# Altium PCB iWoofer_V4_03_OT.PCB.PcbDoc
Units mil, origin at the board's own origin, x right, y up, seen from the top; angles counter-clockwise.
Board outline 944 x 1496.5 mil, 2 copper layers (TopLayer, BottomLayer), stack 39.4 mil thick; 60 components, 43 nets, 210 pads, 64 vias.
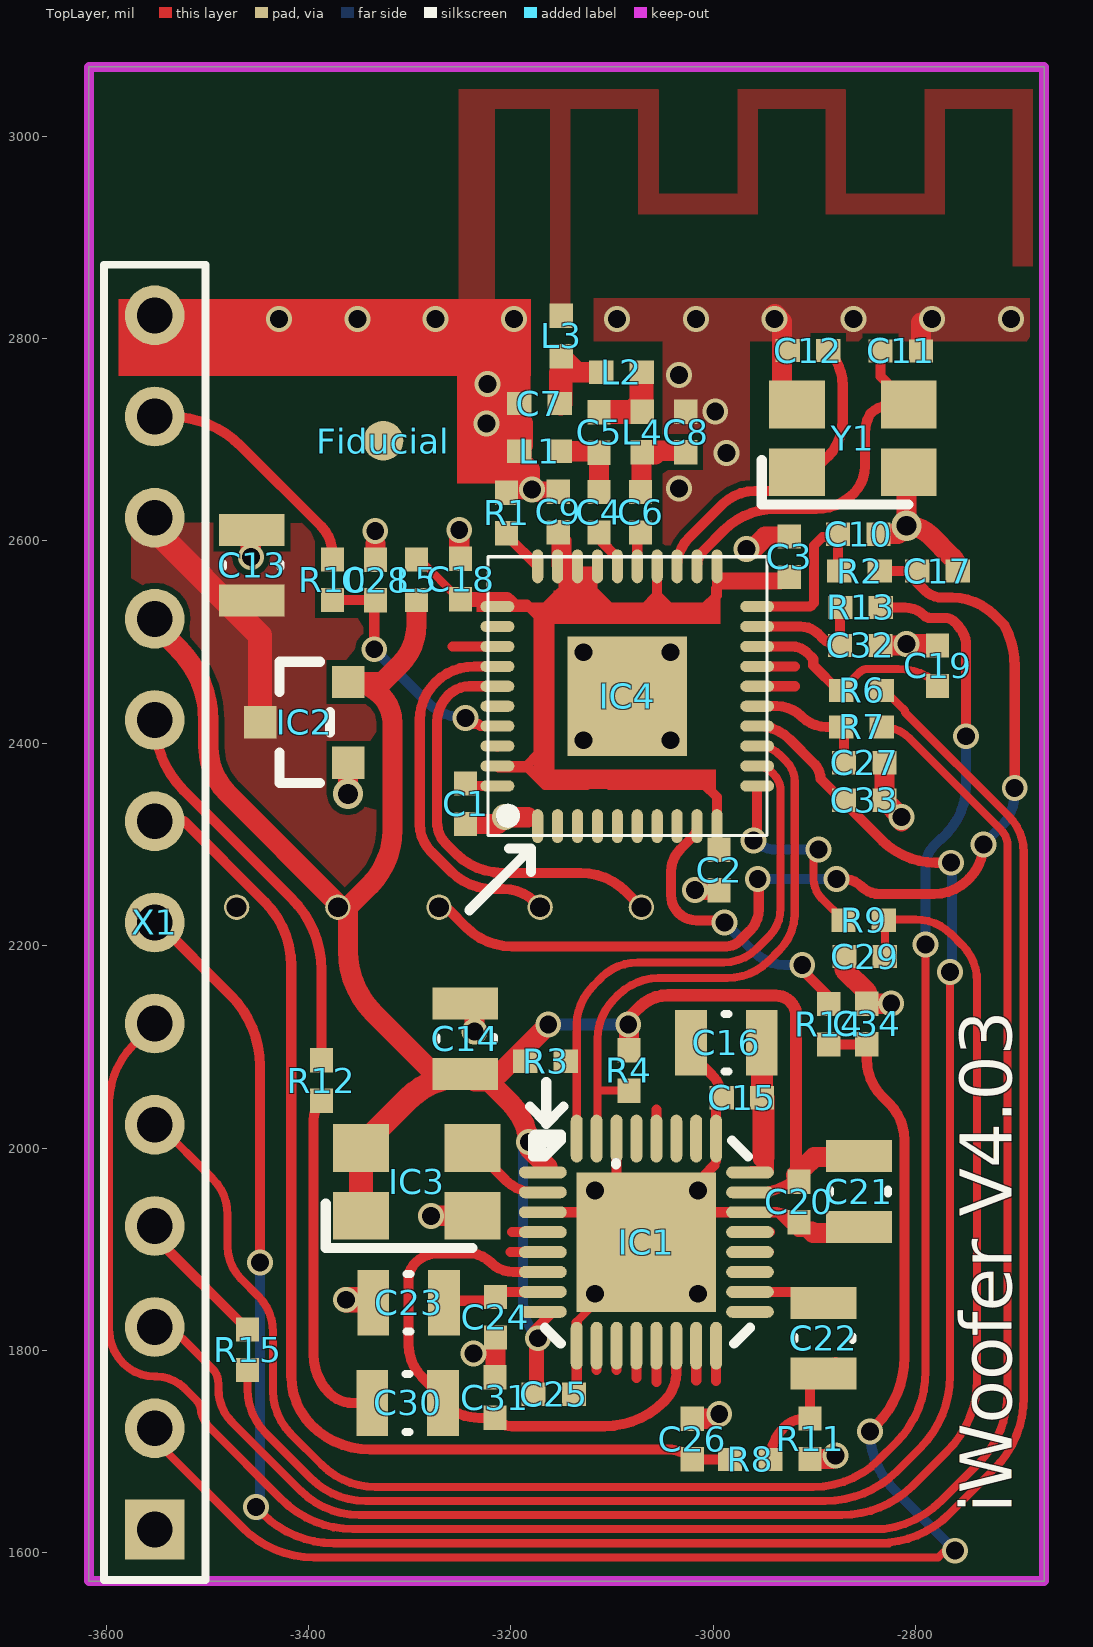
[diagram p0: TopLayer view]
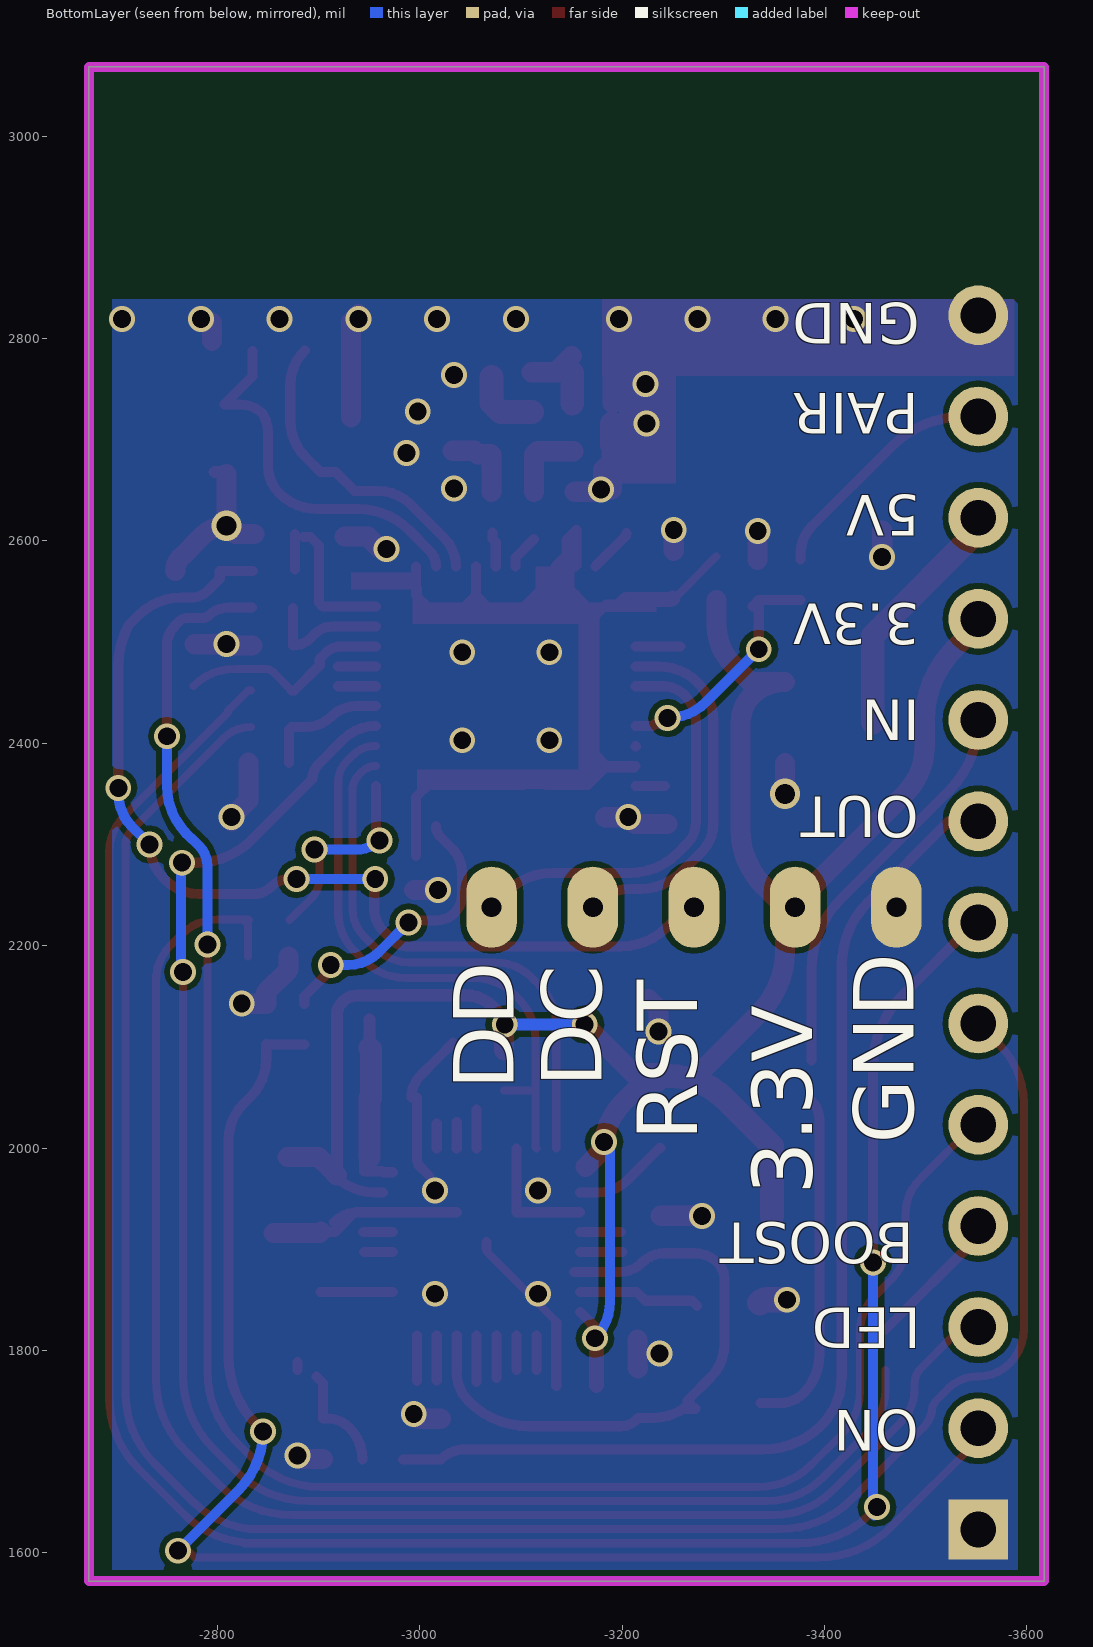
[diagram p1: BottomLayer view, seen from below]
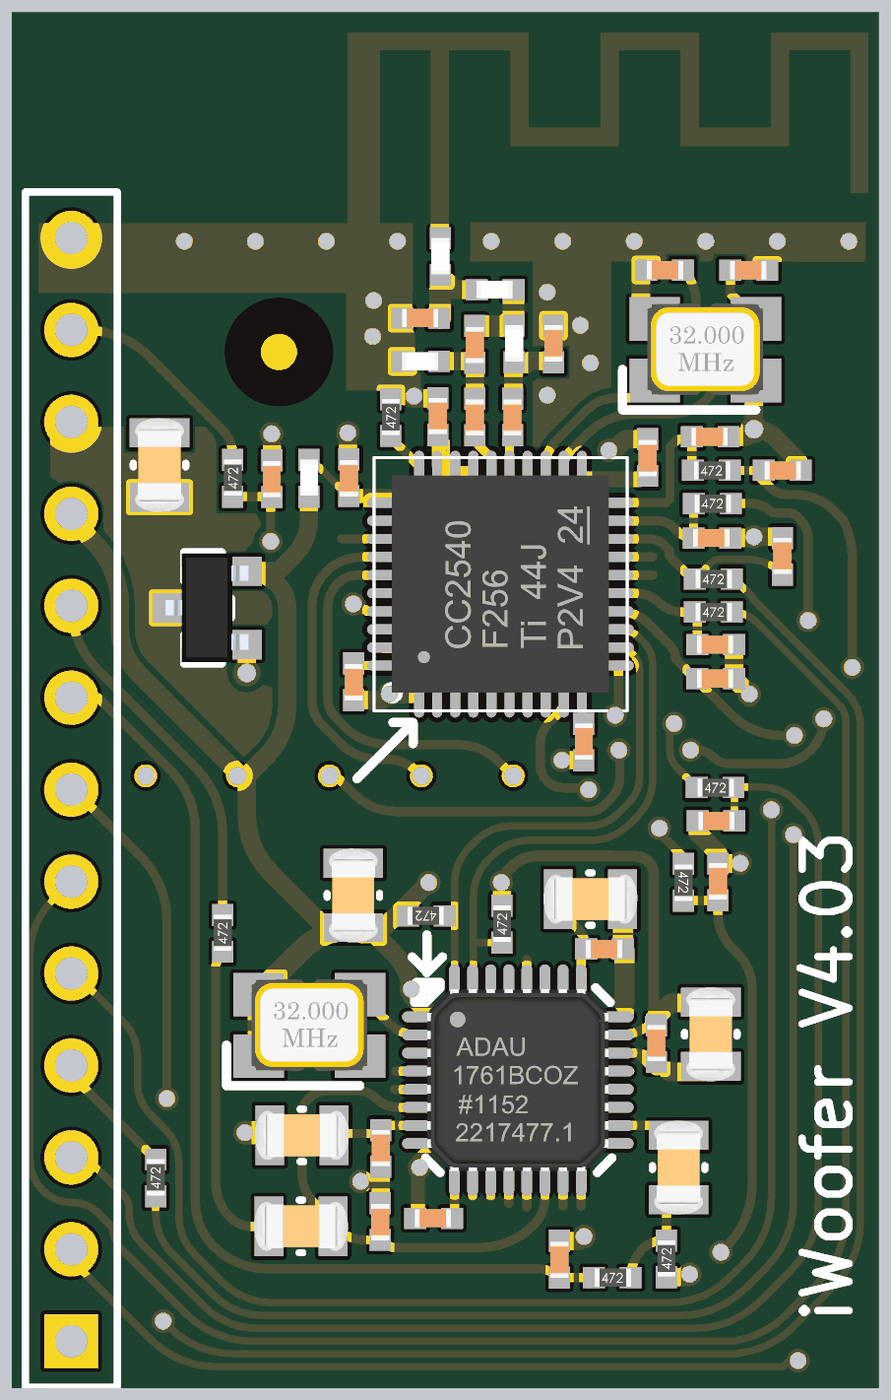
[diagram p2: 3D render of the assembled board from above, using the file's embedded part models]

## Layer stack, top to bottom
TopSolder: solder mask 0.4, Solder Resist, Dk 3.5
TopLayer: signal copper 1.4
Dielectric1: dielectric 36.6, FR-4, Dk 4.8
BottomLayer: signal copper 1.4
BottomSolder: solder mask 0.4, Solder Resist, Dk 3.5

## Board outline
-3617,1572 -3617,3068.5 -2673,3068.5 -2673,1572

## Design rules (kind name [scope] priority, off if disabled: settings)
Clearance HV [All] p1: gap=5.91 ignorepadtopadclearanceinfootprint=FALSE except(0: Arc-Hole Track-Hole SMDPad-Hole THPad-Hole Via-Hole Fill-Hole Poly-Hole Region-Hole Text-Hole)
Clearance clr.5 [All] p2: gap=7.8 ignorepadtopadclearanceinfootprint=FALSE except(0: Arc-Hole Track-Hole SMDPad-Hole THPad-Hole Via-Hole Fill-Hole Poly-Hole Region-Hole Text-Hole)
Clearance [All] p3: gap=7.8 ignorepadtopadclearanceinfootprint=FALSE except(0: Arc-Hole Track-Hole SMDPad-Hole THPad-Hole Via-Hole Fill-Hole Poly-Hole Region-Hole Text-Hole)
ComponentClearance [All] p1: gap=5 collisioncheckmode=3 verticalgap=5 showdistances=TRUE
FabricationTestPointUsage TestPointUsage [All] p1: valid=0 allowmultiple=FALSE
FabricationTestpoint Testpoint [All] p1: side=3 testpointundercomponent=TRUE minsize=40 maxsize=100 preferedsize=60 minholesize=0 maxholesize=40 preferedholesize=32 testpointgrid=1 allowsidetop=TRUE allowsidebottom=TRUE usegrid=TRUE gridtolerance=0.01
PolygonConnect "low voltage" [1 or 2 or 3] p1: connectstyle=Direct reliefconductorwidth=10 reliefentries=4 polygonreliefangle="90 Angle" airgapwidth=10
RoutingVias [All] p1: holewidth=19.68 width=30 viastyle="Through Hole" minholewidth=19.68 minwidth=30 maxholewidth=19.68 maxwidth=30
SilkToSilkClearance [All] p1: silktosilkclearance=0
SilkToSolderMaskClearance SilkscreenOverComponentPads [IsPad] p1: minsilkscreentomaskgap=5.91 clearancetoexposedcopper=TRUE
SolderMaskExpansion [All] p1: expansion=4
Width [All] p1: maxlimit=78.74 minlimit=8 preferedwidth=15.75
25 further rules are at their usual default settings.

## Components (designator, comment, footprint, x,y, rotation, side; value= is the part's Value field where it differs from the comment)
C1 "1u" 0402C -3245,2340 r180 top
C2 "100n" 0402C -2994,2275 r0 top
C3 "100n" 0402C -2925,2584 r180 top
C4 "18p" 0402C -3113,2628 r180 top
C5 "1p" 0402C -3113,2707 r180 top
C6 "18p" 0402C -3072,2628 r180 top
C7 "1p" 0402C -3172,2736 r90 top
C8 "1p" 0402C -3027,2708 r0 top
C9 "220p" 0402C -3153,2629 r0 top
C10 "1n" 0402C -2857,2607 r90 top
C11 "12p" 0402C -2815,2788 r90 top
C12 "12p" 0402C -2906,2788 r270 top
C13 "10u" CAPC0805X15L -3456,2576 r270 top
C14 "10u" CAPC0805X15L -3245,2108 r270 top
C15 "100n" 0402C -2972,2050 r90 top
C16 "10u" CAPC0805X15L -2987,2104 r180 top
C17 "100n" 0402C -2778,2570 r270 top
C18 "100n" 0402C -3250,2562 r180 top
C19 "1n" 0402C -2778,2477 r0 top
C20 "100n" 0402C -2915,1947 r0 top
C21 "10u" CAPC0805X15L -2856,1957 r90 top
C22 "10u" CAPC0805X15L -2891,1812 r270 top
C23 "10u" CAPC0805X15L -3301,1847 r0 top
C24 "100n" 0402C -3215,1833 r0 top
C25 "100n" 0402C -3158,1757 r90 top
C26 "1n" 0402C -3021,1712 r180 top
C27 "1n" 0402C -2851,2381 r90 top
C28 "1n" 0402C -3334,2561 r180 top
C29 "1n" 0402C -2850,2189 r270 top
C30 "10u" CAPC0805X15L -3302,1748 r0 top
C31 "1n" 0402C -3216,1753 r180 top
C32 "1n" 0402C -2855,2497 r90 top
C33 "1n" 0402C -2851,2344 r90 top
C34 "1n" 0402C -2848,2123 r0 top
Fiducial "Comment" FM2 -3326,2699 r0 top
IC1 "ADAU1761" ADAU1761_LONG -3066,1907 r0 top value={Value}
IC2 "SE8533X2" SOT-23_BC807-40(Primary) -3407,2422 r90 top
IC3 "12.288 MHz" OSC_3225 -3289,1996 r0 top
IC4 "CC2540F256" "CC2540 TOP" -3083,2447 r0 top
L1 "2n" 0402L -3172,2689 r90 top
L2 "1n" 0402L -3091,2767 r90 top
L3 "3n" 0402L -3150,2803 r0 top
L4 "2n" 0402L -3070,2708 r0 top
L5 "BEAD" 0402L -3293,2562 r0 top
R1 "56K" 0402R -3204,2628 r0 top
R2 "2.2K" 0402R -2855,2570 r270 top
R3 "4.7k" 0402R -3166,2086 r90 top
R4 "4.7k" 0402R -3083,2077 r0 top
R6 "1k" 0402R -2853,2452 r270 top
R7 "1k" 0402R -2853,2416 r270 top
R8 "270" 0402R -2963,1692 r270 top
R9 "270" 0402R -2851,2225 r270 top
R10 "1k" 0402R -3376,2562 r0 top
R11 "100k" 0402R -2904,1713 r0 top
R12 "1k" 0402R -3387,2067 r0 top
R13 "1k" 0402R -2854,2534 r270 top
R14 "270" 0402R -2886,2122 r180 top
R15 "1k" 0402R -3460,1801 r0 top
X1 "Header 13" HDR1X13 -3552,1623 r90 top
Y1 "32MHz" OSC_3225 -2858,2731 r0 top

## Footprints (in the part's own frame and the unit in brackets; to place one, negate y for a bottom-side part, rotate by r counter-clockwise, add the part's x,y. Pads: shape width x height; smd on the part's side, far side on the other; paste and mask are expansions set on the pad)
0402C [mil]
  rect 23x24 smd paste+0 mask+3.94: 1(-0.24,-20.32) 2(-0.24,19.68)
  body extent -10,-19 10,20, height 20
0402L [mil]
  rect 23x24 smd paste+0 mask+3.94: 1(-0.24,-20.32) 2(-0.24,19.68)
  body extent -10,-19 10,20, height 20
0402R [mil]
  rect 23x24 smd paste+0 mask+3.94: 1(-0.24,-20.32) 2(-0.24,19.68)
  body extent -10,-19 10,20, height 10
ADAU1761_LONG [mm]
  oval 1.2x0.3 smd: 1(-2.6,1.75) 2(-2.6,1.25) 3(-2.6,0.75) 4(-2.6,0.25) 5(-2.6,-0.25) 6(-2.6,-0.75) 7(-2.6,-1.25) 8(-2.6,-1.75) 17(2.6,-1.75) 18(2.6,-1.25) 19(2.6,-0.75) 20(2.6,-0.25) 21(2.6,0.25) 22(2.6,0.75) 23(2.6,1.25) 24(2.6,1.75)
  oval 0.3x1.2 smd: 9(-1.75,-2.6) 10(-1.25,-2.6) 11(-0.75,-2.6) 12(-0.25,-2.6) 13(0.25,-2.6) 14(0.75,-2.6) 15(1.25,-2.6) 16(1.75,-2.6) 25(1.75,2.6) 26(1.25,2.6) 27(0.75,2.6) 28(0.25,2.6) 29(-0.25,2.6) 30(-0.75,2.6) 31(-1.25,2.6) 32(-1.75,2.6)
  rect 3.5x3.5 smd: 22(0,0)
  silkscreen extent -2.85,-2.55 2.6,2.7, body extent -2.51,-2.51 2.51,2.51, height 0.85
CAPC0805X15L [mm] "Chip Capacitor, 2-Leads, Body 2.00x1.60mm, IPC High Density"
  rect 0.8x1.65 smd: 1(-0.889,0) 2(0.889,0)
  silkscreen extent -0.05,-0.72 0.05,0.72, body extent -1.3,-0.68 1.3,0.68, height 0.9
"CC2540 TOP" [mm]
  oval 0.28x0.85 smd paste+0 mask+0.14: 1(-2.298,-3.272) 2(-1.798,-3.272) 3(-1.298,-3.272) 4(-0.798,-3.272) 5(-0.298,-3.272) 6(0.202,-3.272) 7(0.702,-3.272) 8(1.202,-3.272) 9(1.702,-3.272) 10(2.202,-3.272) 21(2.202,3.248) 22(1.702,3.248) 23(1.202,3.248) 24(0.702,3.248) 25(0.202,3.248) 26(-0.298,3.248) 27(-0.798,3.248) 28(-1.298,3.248) 29(-1.798,3.248) 30(-2.298,3.248)
  oval 0.85x0.28 smd paste+0 mask+0.14: 11(3.212,-2.262) 12(3.212,-1.762) 13(3.212,-1.262) 14(3.212,-0.762) 15(3.212,-0.262) 16(3.212,0.238) 17(3.212,0.738) 18(3.212,1.238) 19(3.212,1.738) 20(3.212,2.238) 31(-3.308,2.238) 32(-3.308,1.738) 33(-3.308,1.238) 34(-3.308,0.738) 35(-3.308,0.238) 36(-3.308,-0.262) 37(-3.308,-0.762) 38(-3.308,-1.262) 39(-3.308,-1.762) 40(-3.308,-2.262)
  rect 3x3 smd paste+0 mask+0: 62(-0.043,-0.012)
  silkscreen extent -3.54,-3.51 3.46,3.49, body extent -3.05,-3.01 2.95,2.99, height 0.9
FM2 [mil]
  round 39.4 smd paste-39.4 mask+39.4: 1(0,0)
HDR1X13 [mm] "Connector; Header; 13 Position"
  rect 1.5x1.5 hole 0.9: 1(0,0)
  round 1.5 hole 0.9: 2(2.54,0) 3(5.08,0) 4(7.62,0) 5(10.16,0) 6(12.7,0) 7(15.24,0) 8(17.78,0) 9(20.32,0) 10(22.86,0) 11(25.4,0) 12(27.94,0) 13(30.48,0)
  silkscreen extent -1.27,-1.27 31.75,1.27
OSC_3225 [mm]
  rect 1.4x1.2 smd: 1(-1.5,-1.6) 2(1.3,-1.6) 3(1.3,0.1) 4(-1.5,0.1)
  silkscreen extent -2.39,-2.41 1.3,-1.3, body extent -1.7,-2 1.5,0.53, height 1
SOT-23_BC807-40(Primary) [mil]
  rect 32x32 smd: 1(38.66,-46.26) 2(-41.34,-46.26) 3(-1.34,40.74)
  silkscreen extent -61,-28 59,22, body extent -60,-48 58,43, height 43

## Part data
C1 C2 C3 C10 C15 C17 C18 C19 C20 C24 C25 C26 C27 C28 C29 C31 C32 C33 C34: library part Cap, "Capacitor", LatestRevisionDate=17-Jul-2002, LatestRevisionNote="Re-released for DXP Platform.", PackageReference=RAD-0.3, Published=8-Jun-2000, Publisher="Altium Limited"
C4 C5 C6 C7 C8 C9 C11 C12: library part Cap, "Capacitor NPO", LatestRevisionDate=17-Jul-2002, LatestRevisionNote="Re-released for DXP Platform.", PackageReference=RAD-0.3, Published=8-Jun-2000, Publisher="Altium Limited"
C13 C14 C16 C21 C22 C23 C30: library part Cap, "CL21A476MQMNRN or analog", LatestRevisionDate=17-Jul-2002, LatestRevisionNote="Re-released for DXP Platform.", PackageReference=RAD-0.3, Published=8-Jun-2000, Publisher="Altium Limited"
IC1: "DSP"
IC2: library part 78L05, "REGULATOR"
IC3: library part "YSO 321SR", "12.288 MHz Oscillator 5032 case"
IC4: library part CC2540, "cc2540f256"
L1 L4: library part Inductor, "HBLS1005-2N0S", Code_IEC=1005, Code_JEITA=0402, LatestRevisionDate=17-Jul-2002, LatestRevisionNote="Re-released for DXP Platform.", PackageReference=0402-A, Published=8-Jun-2000, Publisher="Altium Limited"
L2: library part Inductor, "HBLS1005-1N0S", Code_IEC=1005, Code_JEITA=0402, LatestRevisionDate=17-Jul-2002, LatestRevisionNote="Re-released for DXP Platform.", PackageReference=0402-A, Published=8-Jun-2000, Publisher="Altium Limited"
L3: library part Inductor, "HBLS1005-3N0S", Code_IEC=1005, Code_JEITA=0402, LatestRevisionDate=17-Jul-2002, LatestRevisionNote="Re-released for DXP Platform.", PackageReference=0402-A, Published=8-Jun-2000, Publisher="Altium Limited"
L5: library part Inductor, "bead 200@100MHz", Code_IEC=1005, Code_JEITA=0402, LatestRevisionDate=17-Jul-2002, LatestRevisionNote="Re-released for DXP Platform.", PackageReference=0402-A, Published=8-Jun-2000, Publisher="Altium Limited"
R1 R2 R3 R4 R6 R7 R8 R9 R10 R11 R12 R13 R14 R15: library part Res3, "Resistor", LatestRevisionDate=04-Mar-2005, LatestRevisionNote="PCB Footprint replaced.", PackageReference=J1-0603, Published=8-Jun-2000, Publisher="Altium Limited"
X1: "Header, 13-Pin", LatestRevisionDate=17-Jul-2002, LatestRevisionNote="Re-released for DXP Platform.", Publisher="Altium Limited"
Y1: library part XTAL, "Crystal 3225 case 10ppm", LatestRevisionDate=17-Jul-2002, LatestRevisionNote="Re-released for DXP Platform.", PackageReference=R38, Published=8-Jun-2000, Publisher="Altium Limited"

## Free pads (board coordinates)
  round 25 / inner round 60 / far side oval 50x80 hole 19.68: 0(-3471,2238) 0(-3371,2238) 0(-3271,2238) 0(-3171,2238) 0(-3071,2238)

## Via types
v1: diameter 25.59, hole 17.72, TopLayer to BottomLayer, tented both sides, 58 vias
v2: diameter 25.59, hole 17.72, TopLayer to BottomLayer, tented bottom, 4 vias
v3: diameter 30, hole 19.68, TopLayer to BottomLayer, tented both sides, 2 vias

## Nets (pads, with @x,y where several pads share a name; then routed paths per layer and width w, separated by ;. In a path a pad name is that pad's centre, name@x,y a point inside that pad or via, vN(x,y) a via of type N, cw(c..) or ccw(c..) an arc to the next point about the centre after c; other vN are vias at no path point)
3.3VD: C14.2 C20.2 C21.2 C25.2 IC1.1 IC1.8 IC1.23 IC2.1 IC3.1 IC3.4 L5.1 pad.0@-3371,2238 R3.2 R4.2 X1.10 | length 2203.8
  TopLayer w10: v1@-3177,1819.53 -3158.52,1838.01 IC1.8@-3158.52,1838.1 ; IC1.23 -2955.12,1956.21 ccw(c-2955.12,2010.15) C20.2@-2917.01,1971.98 ; C20.2@-2916.98,1972.01 C20.2@-2911.25,1977.74
  TopLayer w12: v1(-3084,2122) -3084,2128 -3072.5,2139.5 cw(c-3044.74,2111.74) -3044.74,2151 -2965.41,2151 -2965,2150.58 -2937.77,2150.58 cw(c-2937.77,2130.81) -2923.79,2144.79 ; -2923.77,2144.77 cw(c-2937.77,2130.81) -2918,2130.81 C20.2@-2918,1973.03 ; -2911.25,1979.78 -2902.24,1988.8
  TopLayer w15: C25.2@-3174.5,1765.21 v1@-3174.5,1810.5
  TopLayer w20: X1.10@-3558,2523 -3528.29,2493.29 cw(c-3599,2422.58) -3499,2422.58 -3499,2397 ccw(c-3432.71,2397) -3479.59,2350.13 pad.0@-3370,2240.54 ; -3340,2259 -3361,2238 -3361,2195 ccw(c-3273.6,2195) -3335.43,2133.23 C14.2@-3269.77,2067.57 ; -3339.98,2259.02 ccw(c-3395.53,2314.53) -3317,2314.53 -3317,2420.2 ccw(c-3355.14,2420.2) -3328.17,2447.17 ; -3328.2,2447.2 ccw(c-3360.74,2414.6) IC2.1 -3326.75,2460.66 -3309.71,2477.71 ccw(c-3349.47,2517.47) -3293.24,2517.47 L5.1 ; C14.2@-3239.6,2074 -3211,2074 v1(-3163,2122) ; C14.2@-3236,2066 -3222,2066 -3200.76,2044.76 ; -3200.75,2044.75 cw(c-3246.04,1999.47) -3182,1999.47 IC1.1@-3164,1981.47 ; v1(-3084,2122) -3083.24,2121.24 R4.2 ; C20.2@-2918,1973.03 -2911.25,1979.78 -2900.03,1991 C21.2@-2869.4,1991
  TopLayer w23.62: IC3.1 IC3.4 -3348.06,2001.94 -3301.63,2048.37 cw(c-3247,1993.75) -3274.34,2066 cw(c-3247,1993.75) -3269.77,2067.57 cw(c-3247,1993.75) C14.2@-3247,2071
  BottomLayer w10: v1@-3188,2000 -3188,1848.21 ccw(c-3136.79,1848.21) v1(-3173,1812)
  BottomLayer w12: v1(-3163,2122) v1(-3084,2122)
  other v1: -3182,2006
+5VDC: C13.2 IC2.3 X1.11 | length 248
  TopLayer w23.62: X1.11@-3558,2623 -3558,2617 -3447.74,2506.74 IC2.3
BOOST: R15.2 X1.4 | length 140.3
  TopLayer w10: X1.4 -3552,1912.45 R15.2
DC: IC4.34 pad.0@-3171,2238 | length 359
  TopLayer w10: -3274.72,2459.98 ccw(c-3237.7,2423.02) -3290.01,2423.02 -3290.01,2320 ccw(c-3251.74,2320) -3278.81,2292.95 -3258.93,2273.07 ccw(c-3217.96,2314.04) -3217.96,2256.09 -3207.61,2256.09 cw(c-3207.61,2211.39) pad.0@-3176.02,2243.02 ; -3274.69,2460.01 -3274.64,2460.06 cw(c-3236,2421.42) -3236,2476.06 IC4.34
DD: IC4.35 pad.0@-3071,2238 | length 416.6
  TopLayer w10: -3261.73,2447.69 ccw(c-3234.76,2420.76) -3272.87,2420.76 -3272.87,2322.05 ccw(c-3242.58,2322.05) -3272.14,2315.41 ccw(c-3242.58,2322.05) -3264.02,2300.65 -3254.73,2291.35 ccw(c-3208,2338.08) -3208,2272 -3131.16,2272 cw(c-3131.16,2208.84) -3086.5,2253.5 pad.0@-3071,2238 ; -3261.69,2447.73 cw(c-3240.78,2426.78) -3240.78,2456.38 IC4.35
GND: C1.2 C2.1 C3.1 C7.2 C8.2 C9.2 C10.1 C11.1 C12.1 C13.1 C14.1 C15.2 C16.2 C17.2 C18.1 C19.2 C20.1 C21.1 C23.1 C24.1 C25.1 C26.1 C27.1 C28.1 C29.1 C31.1 C32.1 C33.1 C34.2 IC1.3 IC1.9 IC1.22 IC1.25 IC1.30 IC2.2 IC3.2 IC4.1 IC4.62 L1.2 L3.2 pad.0@-3471,2238 R1.2 R11.1 X1.1 X1.13 Y1.2 Y1.4 | length 1775.6
  TopLayer w8: -3134.9,1828.71 -3066,1897.6 IC1.22@-3066,1900.87
  TopLayer w10: IC1.3@-3158.52,1936.53 -3095.53,1936.53 IC1.30@-3095.53,1999.52 ; C25.1@-3134.9,1765 IC1.9@-3134.9,1827.29 ; IC1.22@-3066,1900.87 IC1.22@-3066,1907 ; IC1.22@-3036.47,1936.53 -2963.64,1936.53 -2939,1936.53 cw(c-2939,1902.92) -2935.56,1936.35 ; C16.2@-3033,2104 -3018,2089 -3000.82,2071.82 cw(c-3022.88,2049.76) -2997.1,2067.33 cw(c-3022.88,2049.76) C15.2 ; IC1.22@-3009.01,1972.87 -2998.94,1982.94 ; IC1.25@-2997.1,1987.02 IC1.25 C15.2@-2997.1,2049.76 ; -2902.24,1917.14 -2916.35,1917.14 -2935.56,1936.35 ; -2935.56,1936.35 cw(c-2939,1902.92) C20.1 ccw(c-2939,1902.92) -2935.56,1936.35
  TopLayer w12: Y1.2 Y1.2@-2797.29,2668.01
  TopLayer w20: v1(-3457,2584) C13.1@-3457,2610 ; v3(-3361,2350) IC2.2@-3361,2380.4 ; C28.1 v1@-3333.76,2597.24 ; v1@-3281.99,1933.01 IC3.2 ; v1@-3251.56,2611.56 v1(-3251,2611) C18.1@-3251,2590.21 ; C1.2 -3212.68,2320.32 v1(-3206,2327) -3183,2327 ; v1(-3236,2115) -3236,2137 C14.1@-3226,2147 ; v1(-3224,2716) -3189.68,2716 ; C31.1@-3215.76,1782.32 -3215.24,1782.84 C24.1@-3215.24,1810.68 ; C7.2@-3190.68,2735.76 -3190.68,2771.32 ; v1@-3189.68,2651 L1.2@-3189.68,2678.68 ; v1(-3179,2651) -3179.08,2651 -3181.32,2653.24 -3181.32,2670.32 L1.2@-3189.68,2678.68 ; v1@-3176.76,2648.68 C9.2 ; C26.1 v1@-2998.68,1732.32 ; v1(-3018,2255) C2.1@-2994.55,2255 ; v1(-2967,2592) -2961,2592 -2948.68,2604.32 C3.1@-2925.76,2604.32 ; v1@-2939.29,2824 -2932,2816.71 Y1.4@-2932,2722.18 ; R11.1 v1@-2882.32,1692.68 ; -2902.24,1917.14 -2901.09,1916 C21.1@-2855.6,1916 ; C29.1 -2870.32,2176.32 -2848.24,2154.24 C34.2 v1@-2826.68,2142.68 ; C10.1 -2817.24,2606.76 v3(-2809,2615) ; C32.1 v1@-2811.24,2496.76 ; C27.1 C33.1 v1(-2814,2327.08) v1@-2814,2323 ; v1(-2809,2498) C19.2@-2777.55,2498 ; Y1.2@-2809,2665.83 v3(-2809,2615) ; C11.1@-2794.68,2798 v1@-2794.68,2815.68 ; C17.2 ccw(c-2777.82,2570.24) -2762.31,2582.07 ccw(c-2777.82,2570.24) -2764.03,2584.03 -2785.1,2605.1 ccw(c-2809,2581.2) v3(-2809,2615) ; L1.2@-3189.68,2678.68 -3189.68,2694.76 -3190,2694.45 -3190,2679 L1.2@-3189.68,2678.68
  TopLayer w23.62: L1.2@-3189.68,2694.76 -3189.68,2716
  TopLayer w25: v1(-3363,1850) -3343.24,1850 cw(c-3343.24,1839.76) C23.1
  other v1: -2879,1696 -2994,1737 -3237,1797 -3279,1933 -2824,2143 -3128,2403 -3042,2403 -3128,2490 -3042,2490 -3334,2610 -3034,2652 -2987,2687 -2998,2728 -3223,2755 -3034,2764 -3429,2819.44 -3351.67,2819.44 -3274.33,2819.44 -3197,2819.44 -3095,2819.44 -3017.14,2819.44 -2939.29,2819.44 -2861.43,2819.44 -2783.57,2819.44 -2705.71,2819.44
  other v2: -3117,1856 -3015,1856 -3117,1958 -3015,1958
HPF: R6.2 X1.7 | length 2239.6
  TopLayer w8: v1(-3452,1645) -3445.67,1638.67 ccw(c-3374.96,1709.38) -3374.96,1609.38 -2826.43,1609.38 ; R6.2 -2830.39,2452.24 -2820.58,2442.42 ; -2826.43,1609.93 ccw(c-2836.88,1709.38) -2766.17,1638.67 -2722.38,1682.46 ccw(c-2793.09,1753.17) -2693.09,1753.17 -2693.09,2292.33 ccw(c-2743.67,2292.33) -2707.89,2328.07 -2810.41,2430.59 -2810.41,2432.25 -2816.8,2438.64 ; -2820.58,2442.42 -2816.8,2438.64 ; -2820.58,2442.42 -2816.8,2438.64
  TopLayer w10: X1.7@-3558,2223 -3549,2223 -3477,2151 cw(c-3547.01,2080.99) -3448,2080.99 v1(-3448,1887)
  BottomLayer w10: v1@-3449,1637 -3448,1638 v1(-3448,1887)
IN: R12.2 X1.9 | length 404.8
  TopLayer w10: X1.9@-3558,2423 X1.9@-3551.81,2416.81 ; X1.9 ccw(c-3453.02,2423) X1.9@-3551.81,2416.81 ; -3416.39,2246.39 -3523.01,2353.01 cw(c-3453.02,2423) X1.9@-3551.81,2416.81 ; -3416.38,2246.38 cw(c-3486.79,2176) -3387.24,2176 R12.2
LED: C29.2 R9.2 X1.3 | length 1542.4
  TopLayer w8: X1.3@-3540.09,1823 X1.3 cw(c-3552,1784.37) -3524.69,1811.69 -3495.36,1782.36 cw(c-3510.73,1767) -3489,1767 -3489,1761.65 ccw(c-3442.78,1761.65) -3487.94,1751.83 ccw(c-3442.78,1761.65) -3475.46,1728.97 -3407.75,1661.25 ccw(c-3349.65,1719.35) -3349.65,1637.19 -2873.23,1637.19 ccw(c-2873.23,1737.19) -2802.52,1666.48 -2768.38,1700.62 ccw(c-2839.09,1771.33) -2739.09,1771.33 -2739.09,2164.39 ccw(c-2790.61,2164.39) -2754.18,2200.82 -2764.61,2211.25 ccw(c-2800,2175.86) -2800,2225.91 R9.2@-2825.41,2225.91 ; R9.2 -2830.65,2225.91 R9.2@-2825.41,2225.91 ; C29.2 -2830.32,2221 R9.2@-2825.41,2225.91
LPF: R7.2 X1.6 | length 2059.8
  TopLayer w8: -3572.99,2102.01 ccw(c-3514.92,2044) -3597,2044 -3597,1820.8 ccw(c-3549.2,1820.8) -3583,1787 ccw(c-3551.62,1818.38) -3551.62,1774 -3550.26,1774 cw(c-3550.26,1734.74) -3522.5,1762.5 -3511.22,1751.22 cw(c-3524.21,1738.24) -3506.9,1744.37 ; -3505.84,1738.24 ccw(c-3524.21,1738.24) -3506.9,1744.37 ; R7.2 cw(c-2833.32,2377.17) -2805.69,2404.79 -2715.95,2315.05 cw(c-2732.72,2298.28) -2709,2298.28 -2709,1758.34 cw(c-2809,1758.34) -2738.29,1687.63 -2774.33,1651.59 cw(c-2845.04,1722.3) -2831.06,1623.28 -3355.86,1623.28 cw(c-3355.86,1723.28) -3426.57,1652.57 -3497.1,1723.1 cw(c-3473.2,1747) -3506.9,1744.37
NetC1_1: C1.1 IC4.40 | length 29.1
  TopLayer w10: C1.1@-3242.4,2357.95 IC4.40
NetC2_2: C2.2 C3.2 C9.1 C18.2 IC4.10 IC4.21 IC4.24 IC4.27 IC4.28 IC4.29 IC4.31 IC4.39 L5.2 | length 979.7
  TopLayer w8: L5.2@-3293.24,2584.68 -3292.94,2584.68 -3269.86,2561.6 -3269.86,2561.31 -3254.55,2546 C18.2@-3253,2546
  TopLayer w10: IC4.31 -3193,2535.12 ; -3200.09,2542.21 -3194.88,2537 -3184.05,2537 -3172.43,2525.38 -3172.43,2389.71 -3184.49,2377.64 IC4.39 -3211.95,2376.34 -3183.2,2376.34 -3172.43,2365.57 -3172.43,2365.43 -3166.02,2359.02 -3125.02,2359.02 ; -3165.87,2534.06 -3134.12,2565.81 -3123.51,2565.81 -3123.51,2555.2 -3102.36,2534.06 -3067.45,2534.06 -3056.68,2544.83 ; IC4.29 -3154.68,2575.76 -3154.68,2610.76 -3145,2601.08 -3145,2585.76 ; -3152,2592.76 -3145,2585.76 ; -3145,2573 -3145,2585.76 ; IC4.28 -3145,2585.76 ; -3102.36,2359.02 -3008.39,2359.02 -2996.32,2346.95 IC4.10 C2.2@-2996.32,2288.68 ; IC4.24 -3055.38,2546.12 -3056.68,2544.83 ; IC4.21 -2996.32,2546.12 -3008.39,2534.06 -3043.31,2534.06 -3054.08,2544.83 -3056.68,2544.83
  TopLayer w15: C18.2@-3249.76,2542.7 C18.2@-3249.76,2543.32 ; C18.2@-3246.22,2542.21 -3204,2542.21
NetC4_1: C4.1 C5.2 L1.1 | length 77.3
  TopLayer w20: L1.1 -3116.21,2688.76 -3112.76,2685.32 C4.1
NetC4_2: C4.2 IC4.26 | length 34.3
  TopLayer w10: C4.2@-3112.76,2601.76 -3094.75,2583.75 IC4.26
NetC5_1: C5.1 L2.1 L4.2 | length 69.4
  TopLayer w23.62: C5.1@-3110.76,2727.32 -3079.76,2727.32 -3070.68,2736.39 L2.1@-3070.68,2762
NetC6_1: C6.1 C8.1 L4.1 | length 77
  TopLayer w20: C6.1@-3070.76,2648.32 -3070.76,2685.16 -3070.24,2685.68 -3057.32,2685.68 -3053.76,2689.24 C8.1@-3032.32,2689.24
NetC6_2: C6.2 IC4.25 | length 34.8
  TopLayer w10: IC4.25 -3075.06,2598.94 -3071.76,2602.24 C6.2
NetC7_1: C7.1 L2.2 L3.1 | length 93.1
  TopLayer w20: -3150.68,2766 -3149.92,2766.76 -3134.32,2766.76 ; L3.1 -3134.32,2766.76 ; L2.2 -3134.32,2766.76
  TopLayer w23.62: C7.1@-3150.68,2735.76 -3150.68,2766
NetC10_2: C10.2 IC4.20 R2.1 | length 168.5
  TopLayer w10: IC4.20 -2904.16,2535.12 -2900.39,2538.89 -2900.39,2595.61 -2892,2604 C10.2@-2885,2604 ; R2.1@-2876.68,2571.61 C10.2
NetC11_2: C11.2 IC4.22 Y1.3 | length 371.3
  TopLayer w10: IC4.22 cw(c-2994.01,2574.88) -3009.58,2590.42 -2989.03,2610.97 cw(c-2939.44,2561.39) -2939.44,2631.51 -2898.62,2631.51 ccw(c-2898.62,2684.62) -2861.09,2647.04 ; -2861.07,2647.07 ccw(c-2887.78,2673.78) -2850,2673.78 -2850,2706.12 cw(c-2809.24,2706.12) -2845.09,2725.51 cw(c-2822.33,2702.75) -2822.33,2734.94 Y1.3 -2834.68,2762.8 C11.2
NetC12_2: C12.2 IC4.23 Y1.1 | length 312.5
  TopLayer w10: IC4.23 cw(c-2996.04,2574.88) -3024.08,2602.92 -2991,2636 cw(c-2958.68,2603.68) -2958.68,2649.39 -2935.68,2649.39 Y1.1 -2901.99,2668.01 -2887,2683 ; -2886.96,2683.04 ccw(c-2923.2,2719.21) -2872,2719.21 -2872,2753.68 ccw(c-2920.87,2753.68) C12.2
NetC15_1: C15.1 C16.1 IC1.24 | length 181.6
  TopLayer w10: IC1.24@-2973.48,1975.9 -2973.38,1976 IC1.24@-2963.54,1976 ; IC1.24 IC1.24@-2963.54,1976 ; -2950.22,1991 -2945,1985.78 -2945,1977 -2962.54,1977 IC1.24@-2963.54,1976
  TopLayer w12: C16.1@-2950.22,2099 C16.1@-2950.22,2126.78
  TopLayer w22: C15.1 -2951.68,2097.54 C16.1@-2950.22,2099 ; -2950.22,1991 C15.1@-2950.22,2049.76
NetC19_1: C19.1 IC4.18 R6.1 | length 214.1
  TopLayer w8: R6.1 -2855.28,2470.28 cw(c-2847.15,2462.15) -2847.15,2473.64 -2817.17,2473.64 cw(c-2817.17,2415.75) C19.1@-2776.24,2456.68
  TopLayer w10: IC4.18 -2922,2495.75 cw(c-2922,2475) -2907.33,2489.67 -2901.13,2483.47 -2901.13,2477.13 -2876.24,2452.24 R6.1
NetC22_1: C22.1 IC1.18 | length 71.5
  TopLayer w10: IC1.18@-2973.48,1857.79 C22.1@-2902,1857.79
NetC22_2: C22.2 R8.2 R11.2 | length 114.9
  TopLayer w10: R8.2 cw(c-2898.78,1692.24) -2930.27,1723.73 cw(c-2908.65,1702.11) -2908.65,1732.69 R11.2 -2904.24,1767.76 C22.2@-2898,1774 ; C22.2@-2879.32,1780.61 C22.2@-2879.32,1788.24
NetC23_2: C23.2 C24.2 IC1.7 | length 121.2
  TopLayer w10: C23.2@-3274,1844 -3269,1849 -3223,1849 -3214.21,1857.79 IC1.7@-3158.52,1857.79
NetC27_2: C27.2 IC4.15 R7.1 | length 121.6
  TopLayer w10: IC4.15 -2937.32,2436.69 cw(c-2937.32,2401.37) -2912.36,2426.36 ; -2912.33,2426.33 ccw(c-2887.94,2450.75) -2887.94,2416.24 R7.1 ; C27.2 R7.1@-2870.68,2413.61
NetC28_2: C28.2 IC4.37 R10.1 | length 256
  TopLayer w10: R10.1 C28.2@-3335.24,2541.68 ; v1(-3335,2493) -3335,2540.08 C28.2 ; C28.2@-3331.24,2537.68 C28.2@-3329,2535.45 ; v1@-3250,2419 -3232,2419 -3230.01,2417.01 IC4.37
  BottomLayer w10: v1(-3335,2493) -3282.55,2440.55 ccw(c-3245,2478.11) v1(-3245,2425) ; v1@-3247.09,2425 v1@-3240.31,2418.21
NetC30_1: C30.1 R12.1 | length 340.1
  TopLayer w10: R12.1 ccw(c-3368.49,2027.94) -3395,2028 ccw(c-3368.49,2027.94) -3395,2027.94 -3395,1796.08 ccw(c-3340.37,1796.08) -3379.02,1757.47 ; -3378.98,1757.43 ccw(c-3356.19,1780.26) -3364.16,1749 ccw(c-3356.19,1780.26) -3356.19,1748 C30.1
NetC30_2: C30.2 C31.2 IC1.6 IC1.14 | length 612.4
  TopLayer w10: -3294.5,1886.5 ccw(c-3278.81,1870.81) -3301,1870.81 -3301,1805.38 ccw(c-3256.62,1805.38) -3288.03,1774.03 C30.2@-3264.5,1750.5 ; -3294.48,1886.52 cw(c-3271.57,1863.57) -3271.57,1896 -3242.1,1896 cw(c-3242.1,1864.37) -3219.74,1886.74 ccw(c-3197.37,1909.1) -3197.37,1877.47 IC1.6@-3152.36,1877.47 ; C30.2@-3272.32,1742.32 C30.2@-3260.21,1742.32 ; C30.2 ccw(c-3231.55,1783.45) C30.2@-3260.21,1742.32 ; IC1.14@-3036.47,1814.48 IC1.14 -3036.47,1778 cw(c-3076.24,1778) -3048.12,1749.88 -3048.5,1749.5 cw(c-3107.65,1808.65) -3107.65,1725 -3199,1725 cw(c-3199,1745.4) -3213.42,1730.97 C31.2 -3231.55,1733.32 cw(c-3231.55,1783.45) -3239.81,1734 cw(c-3231.55,1783.45) -3251.42,1737.42 cw(c-3231.55,1783.45) C30.2@-3260.21,1742.32
NetC32_2: C32.2 IC4.19 R13.1 | length 124.6
  TopLayer w10: IC4.19 -2913.94,2515.43 cw(c-2913.94,2490.06) -2896.02,2508.02 -2891.89,2503.89 ; -2891.88,2503.88 ccw(c-2874.68,2521.1) C32.2 R13.1@-2874.68,2533.87
NetC33_2: C33.2 IC4.14 R15.1 | length 1588.5
  TopLayer w8: R15.1 -3460.24,1762 ccw(c-3398.04,1762) -3442.02,1718.02 -3397.5,1673.5 ccw(c-3343.41,1727.59) -3343.41,1651.09 -2889.33,1651.09 ccw(c-2889.33,1751.09) -2818.62,1680.38 -2795.29,1703.71 ccw(c-2866,1774.42) -2766,1774.42 v1(-2766,2174)
  TopLayer w10: IC4.14 -2955.85,2417.01 cw(c-2955.85,2372.6) -2924.46,2404.01 -2900.05,2379.6 ; -2900.04,2379.59 cw(c-2914.65,2365) -2894,2365 -2833,2304 ccw(c-2779.89,2357.11) -2779.89,2282 v1(-2765,2282)
  BottomLayer w10: v1@-2765,2175 -2764.09,2175.91 -2764.09,2281.09 v1(-2765,2282)
NetIC1_2: IC1.2 IC3.3 | length 95.7
  TopLayer w10: IC3.3 -3236.94,1999.94 -3205,1968 ; -3205,1968 ccw(c-3176.54,1996.46) -3176.54,1956.21 IC1.2 IC1.2@-3158.52,1956.21
NetIC4_9: IC4.9 R14.1 | length 280.2
  TopLayer w10: -3034.37,2232.37 cw(c-3016.6,2250.1) -3041.7,2250.1 -3041.7,2273 cw(c-3009.88,2273) -3032.38,2295.5 -3020.47,2307.41 ccw(c-3031.26,2318.19) IC4.9 ; -3034.33,2232.33 ccw(c-3016.6,2250.1) -3016.6,2225 -2991,2225 v1(-2989,2223) ; v1@-2911,2175 -2885.76,2149.76 R14.1
  BottomLayer w10: v1(-2989,2223) -2959.73,2193.73 ccw(c-2929,2224.46) -2929,2181 v1(-2912,2181)
NetIC4_11: IC4.11 R9.1 | length 192.6
  TopLayer w8: v1(-2896,2295) -2900.7,2290.3 -2900.7,2266 ccw(c-2873.23,2266) -2892.66,2246.58 R9.1
  TopLayer w10: v1@-2956.56,2314.44 IC4.11
  BottomLayer w10: v1(-2960,2304) ccw(c-2938.27,2325.73) -2941.13,2295.13 ccw(c-2938.27,2325.73) -2938.27,2295 v1(-2896,2295)
NetIC4_30: IC4.30 R1.1 | length 45.3
  TopLayer w10: R1.1 ccw(c-3199.27,2607.68) R1.1@-3202.79,2604.19 ; R1.1@-3202.78,2604.18 IC4.30
ON: C34.1 R14.2 X1.2 | length 1443.7
  TopLayer w8: X1.2 -3552,1711.48 -3465.28,1624.76 ccw(c-3394.57,1695.47) -3394.57,1595.47 -2777.53,1595.47 -2773,1600 v1@-2756,1600
  TopLayer w10: R14.2 -2848.61,2102.32 C34.1 -2848.24,2088 ccw(c-2795.69,2088) -2832.87,2050.87 ; v1(-2845,1720) -2839,1726 ccw(c-2906.6,1793.6) -2811,1793.6 -2811,2007.79 ccw(c-2862.21,2007.79) -2825.99,2043.99 ; -2832.85,2050.85 -2826,2044
  BottomLayer w10: v1(-2845,1720) ccw(c-2762.92,1720) -2820.99,1661.99 ; -2820.96,1661.96 v1(-2761,1602)
OUT: C26.2 R8.1 X1.8 | length 1094
  TopLayer w10: X1.8 -3522.9,2323 -3443.45,2243.55 ; -3443.43,2243.53 cw(c-3507.31,2179.69) -3417,2179.69 -3417,1774.28 ccw(c-3348.72,1774.28) -3397,1726 ; -3396.97,1725.97 ccw(c-3339.06,1783.94) -3339.06,1702 -3044.15,1702 cw(c-3044.15,1668.93) -3038.62,1701.54 cw(c-3044.15,1668.93) C26.2 R8.1@-2983.39,1692.32
PAIR: R10.2 X1.12 | length 246.9
  TopLayer w10: X1.12@-3558,2723 X1.12 -3537.42,2723 cw(c-3537.42,2623) -3466.71,2693.71 -3387.72,2614.72 ; -3387.69,2614.69 cw(c-3415.43,2587) -3376.24,2587 R10.2
PH: R13.2 X1.5 | length 1903.5
  TopLayer w8: X1.5@-3558,2023 -3548,2023 -3494.85,1969.85 ; -3494.83,1969.83 cw(c-3530.7,1934) -3480,1934 -3480,1903.09 ccw(c-3433.91,1903.09) -3466.5,1870.5 -3449.85,1853.85 ; -3449.83,1853.83 cw(c-3485.7,1818) -3435,1818 -3435,1759.75 ccw(c-3375.25,1759.75) -3417.53,1717.53 -3386.92,1686.92 ccw(c-3334,1739.84) -3334,1665 -2901.18,1665 ccw(c-2901.18,1757.18) -2836,1692 -2819.29,1708.71 ccw(c-2890,1779.42) -2790,1779.42 v1(-2790,2201)
  TopLayer w10: R13.2 -2810.71,2534.24 cw(c-2810.71,2506.55) -2791.13,2526.13 ccw(c-2785.99,2531.26) -2785.99,2524 -2771,2524 cw(c-2771,2510.5) -2761.46,2520.05 -2757.7,2516.29 ; -2758,2516 cw(c-2777.3,2496.69) -2750.7,2502.82 cw(c-2777.3,2496.69) -2750,2496.69 v1(-2750,2407)
  BottomLayer w10: v1(-2790,2201) -2790,2278.86 cw(c-2761.86,2278.86) -2781.78,2298.74 ; -2781.76,2298.76 -2774.82,2305.7 -2774.3,2305.7 -2770,2310 ccw(c-2818.28,2358.28) -2750,2358.28 v1(-2750,2407)
RST: C17.1 pad.0@-3271,2238 R2.2 | length 1012.6
  TopLayer w10: pad.0@-3261,2235 -3244,2218 ; -3243.97,2217.97 ccw(c-3198.85,2263.15) -3198.85,2199.3 -2987,2199.3 ccw(c-2987,2218.17) -2973.66,2204.83 -2963.74,2214.74 ccw(c-2984.84,2235.84) -2955,2235.84 v1@-2955,2267 ; v1(-2956,2266) v1@-2955,2267 ; v1(-2878,2266) -2871.61,2266 cw(c-2871.61,2240.39) -2853.5,2258.5 ; -2853.5,2258.5 ccw(c-2835.39,2276.61) -2835.39,2251 -2781.91,2251 ccw(c-2781.91,2297.91) -2748.75,2264.73 -2746.8,2266.68 ; R2.2 -2802.32,2570.24 -2802.32,2562.59 -2790.86,2551.14 ccw(c-2773.63,2568.37) -2773.63,2544 -2764,2544 cw(c-2764,2484.6) -2722,2526.6 -2712.26,2516.86 cw(c-2789.53,2475.75) -2702,2475.75 v1(-2702,2356) ; -2746.78,2266.7 ccw(c-2780.12,2300) v1(-2733,2300) ; v1@-2955,2267 -2955,2272 -2953,2270 -2953,2269 v1@-2955,2267
  BottomLayer w10: v1(-2956,2266) v1(-2878,2266) ; v1(-2733,2300) -2716,2317 ccw(c-2749.8,2350.8) -2702,2350.8 v1(-2702,2356)
SCL: IC1.32 IC4.12 R3.1 | length 539
  TopLayer w8: IC1.32@-3134.9,1999.52 IC1.32 -3134.9,2121 cw(c-3079.12,2121) -3118.58,2160.42 -3110.5,2168.5 cw(c-3074.54,2132.54) -3074.54,2183.39 -2990,2183.39 ccw(c-2990,2230.21) -2956.89,2197.11 -2945,2209 ; IC4.12 cw(c-2956.56,2358.51) -2943.04,2372.04 -2940,2369 cw(c-2956.18,2352.82) -2933.3,2352.82 -2933.3,2237.25 cw(c-2973.25,2237.25) -2944.98,2209.02
SDA: IC1.31 IC4.13 R4.1 | length 592
  TopLayer w8: IC1.31@-3115.21,1999.52 -3114.31,2000.43 -3114.31,2057 ; -3093.42,2151.58 -3098,2147 ccw(c-3058.63,2107.63) -3114.31,2107.63 -3114.31,2057 ; -3093.4,2151.6 cw(c-3054,2112.15) -3054,2167.91 -2986.4,2167.91 ccw(c-2986.4,2226.27) -2945.13,2185 -2934.97,2195.15 ccw(c-2972.82,2233) -2919.39,2229.76 ; R4.1 -3113.99,2056.68 -3114.31,2057 ; IC4.13 -2954.42,2397.32 cw(c-2954.42,2369.85) -2935.02,2389.3 -2927.72,2382 cw(c-2947.83,2361.89) -2919.39,2361.89 -2919.39,2229.76 ; -2919.3,2233 cw(c-2972.82,2233) -2919.39,2229.76
pads on no net: Fiducial.1 IC1.4 IC1.5 IC1.10 IC1.11 IC1.12 IC1.13 IC1.15 IC1.16 IC1.17 IC1.19 IC1.20 IC1.21 IC1.26 IC1.27 IC1.28 IC1.29 IC4.2 IC4.3 IC4.4 IC4.5 IC4.6 IC4.7 IC4.8 IC4.16 IC4.17 IC4.32 IC4.33 IC4.36 IC4.38
copper on no net: | length 592.3
  TopLayer w10: -3257.75,2495.75 -3213.25,2495.75 ; -3213.45,2397.13 -3213.25,2397.32 ; -3200.16,1897.16 -3173.88,1897.16 -3158.52,1897.16 ; -3198.84,1916.84 -3158.52,1916.84 ; -3115.21,1780.79 -3115.21,1814.48 ; -3095.53,1780.53 -3095.53,1814.48 ; -3075.84,1772.84 -3075.84,1814.48 ; -3056.16,1769 -3056.16,1814.48 ; -3056.16,1999.52 -3056.16,2037.84 ; -3036.47,1999.52 -3036.47,2025.47 ; -3016.79,1770.21 -3016.79,1814.48 ; -3016.79,1999.52 -3016.79,2024.21 ; -2997.1,1770 -2997.1,1814.48 ; -2973.48,1897.16 -2944.84,1897.16 ; -2973.48,1916.84 -2944.16,1916.84 ; -2956.56,2456.38 -2919,2456.38 ; -2956.56,2476.06 -2919,2476.06

## Polygon pours and split planes (outlines as drawn)
+5VDC on TopLayer "BottomLayer-No Net" (solid, remove dead copper, pour order 22): -3316,2617 -3317,2618 -3575,2618 -3575,2221 -3557,2203 -3354,2203 -3354,2204 -3300,2258
GND on TopLayer "BottomLayer-No Net" (solid, remove dead copper, pour order 20): -3251.32,2834.2 -3215.88,2834.2 -3215.88,3026.88 -3216,3027 -3161,3027 -3161,2834.44 -3160.76,2834.2 -3141.08,2834.2 -3141.08,3026.92 -3141,3027 -3074,3027 -3074,2922.94 -3074.15,2922.79 -2956.04,2922.79 -2956.04,3026.96 -2956,3027 -2889,3027 -2889,2922.9 -2889.11,2922.79 -2771,2922.79 -2771,3027 -2704,3027 -2704,2871.68 -2704.07,2871.61 -2684.39,2871.61 -2684.39,3046.41 -2790.69,3046.41 -2790.69,2943.31 -2791,2943 -2869,2943 -2869,3045.98 -2869.43,3046.41 -2975.72,3046.41 -2975.72,2943.28 -2976,2943 -3054,2943 -3054,3045.94 -3054.46,3046.41 -3251.32,3046.41 -3251.32,2834.2 -3215.88,2834.2
GND on TopLayer "BottomLayer-No Net" (solid, pour order 7): -3050,2802 -3050,2593 -3047.34,2596 -2964,2596 -2964,2820 -2965.77,2822
GND on TopLayer "BottomLayer-GND1 2" (solid, pour order 8): -3118,2839.96 -3118,2797.55 -2687,2797 -2687,2801 -2687,2809.23 -2687,2839.96
GND on BottomLayer "BottomLayer-No Net" (solid, remove dead copper, pour order 6): -3591,2837.06 -3589.43,2839 -2696,2839 -2696,1572 -3591,1572

## Keep-outs
KeepOutLayer:
  the board outline again, w10

## Other copper
TopLayer:
  rectangle net NetC2_2: -2995,2552 -2932,2569
  rectangle net GND: -3253,2657 -3197,2772
  rectangle net NetC2_2: -3002,2518 -2993,2555
  rectangle net NetC2_2: -3234,2530 -3172.43,2539
  region net NetC2_2: -2997,2355 -2997,2374 -3164,2374 -3164,2355
  region net NetC2_2: -3157,2363 -3157,2522 -3177,2522 -3177,2363
  region net NetC2_2: -3114.43,2532 -3114.43,2551 -3158,2551 -3158,2532
  region net NetC2_2: -2994,2518 -2994,2539 -3176,2539 -3176,2518
  rectangle net GND: -3588,2763 -3180,2839
  region net NetC2_2: -3114.43,2551 -3114.43,2574.88 -3153,2574.88 -3153,2551

## Silkscreen, mask and mechanical layers (free items; w line width, h text height)
TopOverlay:
  lines w10: -3241,2235 -3185,2291 ; -3202,2296 -3180,2296 -3180,2273 ; -3181,2041 -3165,2025 ; -3165,2065 -3165,2024 -3148,2041 ; -3096,1984 -3096,1985 -3096,1984
  text "iWoofer V4.03" at -2705,1639 h51.18 r90
BottomOverlay:
  text "GND" at -3494,2835 h40 r180
  text "PAIR" at -3493,2746 h40 r180
  text "5V" at -3494,2645 h40 r180
  text "3.3V" at -3494,2538 h40 r180
  text "IN" at -3494,2443 h40 r180
  text "OUT" at -3493,2347 h40 r180
  text "DC" at -3180,2060 h60 r270
  text "DD" at -3093,2057.63 h60 r270
  text "RST" at -3274,2007 h60 r270
  text "GND" at -3488,2004 h60 r270
  text "3.3V" at -3388,1954 h60 r270
  text "BOOST" at -3488,1926 h40 r180
  text "LED" at -3495,1842 h40 r180
  text "ON" at -3493,1741 h40 r180

## Dimensions
-2554,3068.5 to -2673,1572 on Mechanical15
-3617,3070.08 to -2673,3068.5 on Mechanical15